# Altium PCB spectroscopy_pcb.PcbDoc
Units mm, origin at the board's own origin, x right, y up, seen from the top; angles counter-clockwise.
Board outline 62.86 x 32.89 mm, 4 copper layers (Top Layer, Mid Layer 1, Mid Layer 2, Bottom Layer), stack 1.57 mm thick; 52 components, 39 nets, 192 pads, 13 vias.
Unrouted connection lines stored in the file: 61.
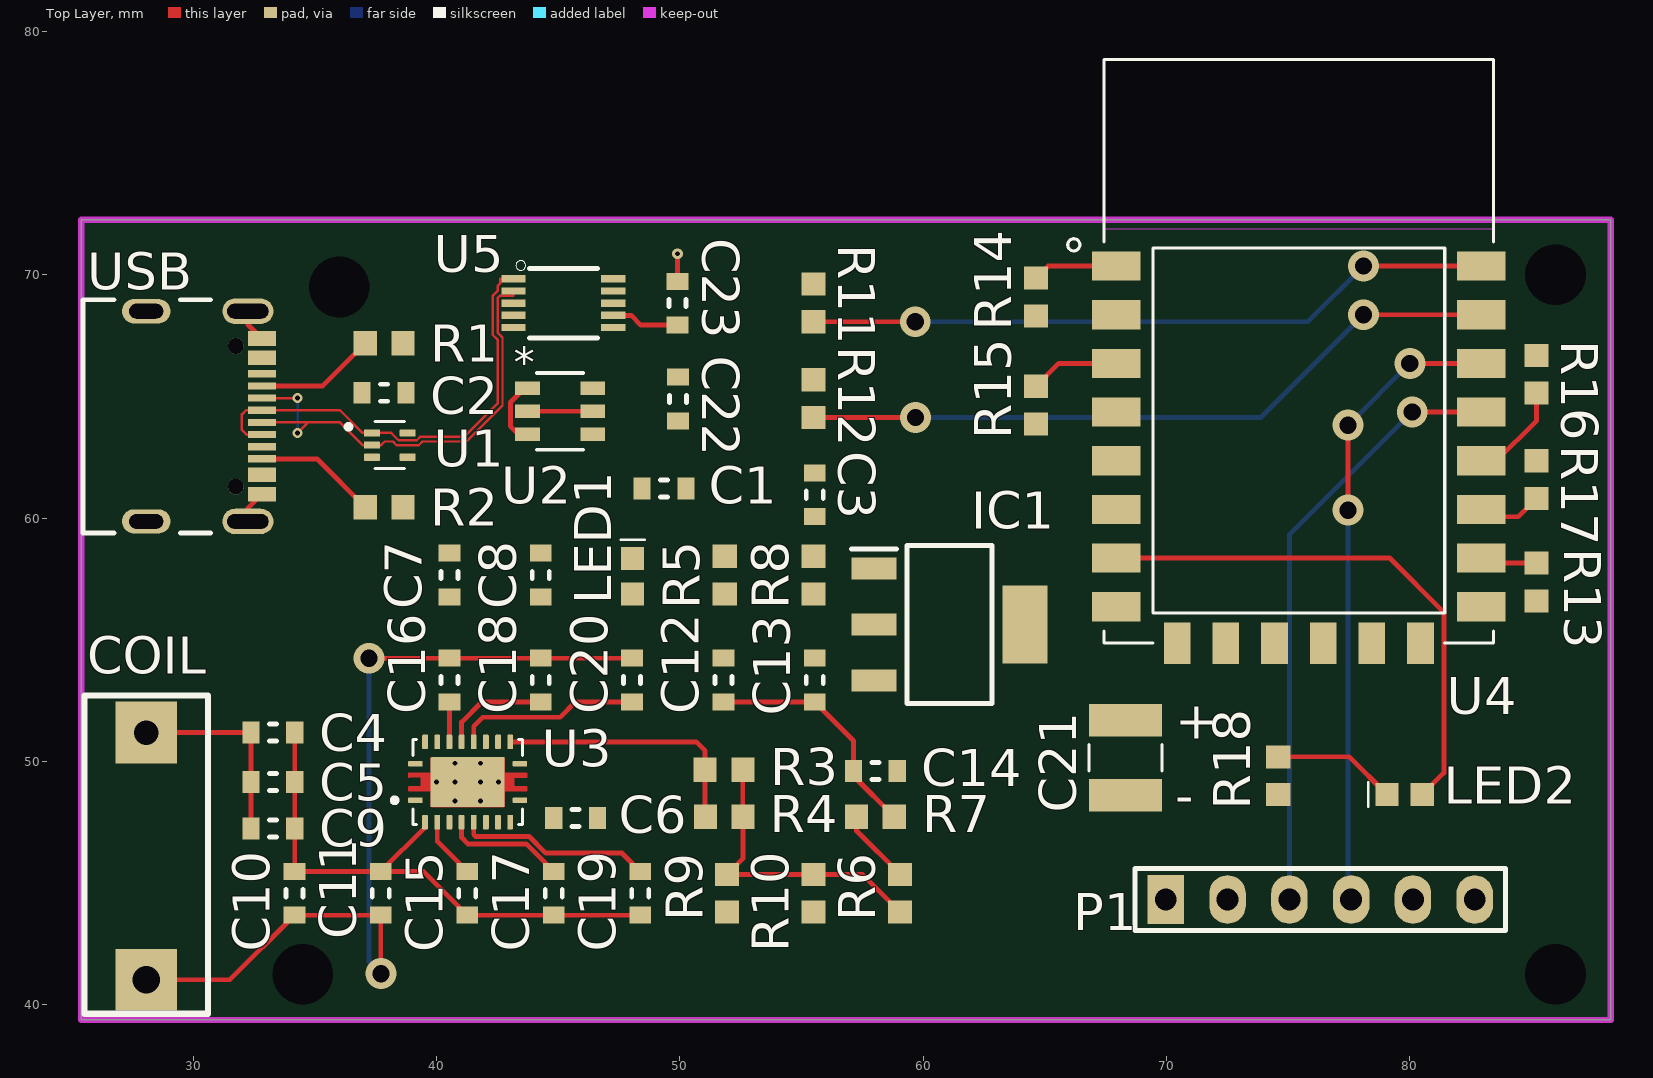
[diagram p0: Top Layer view]
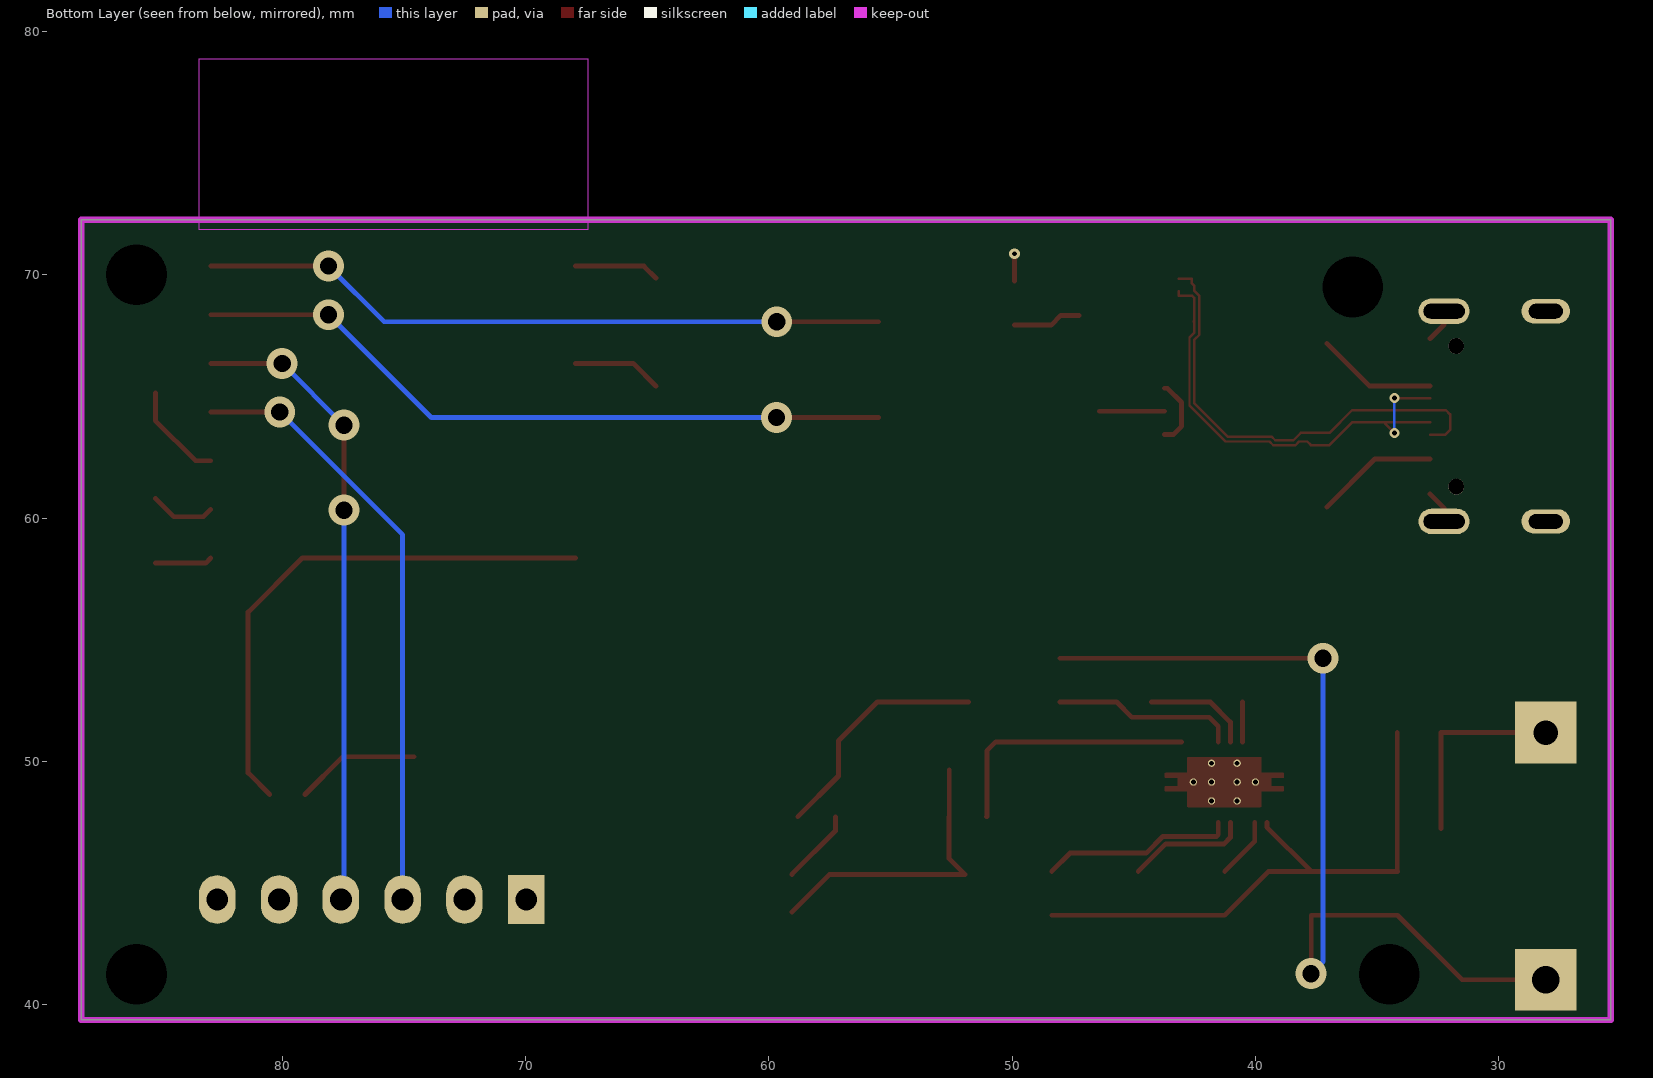
[diagram p1: Bottom Layer view, seen from below]
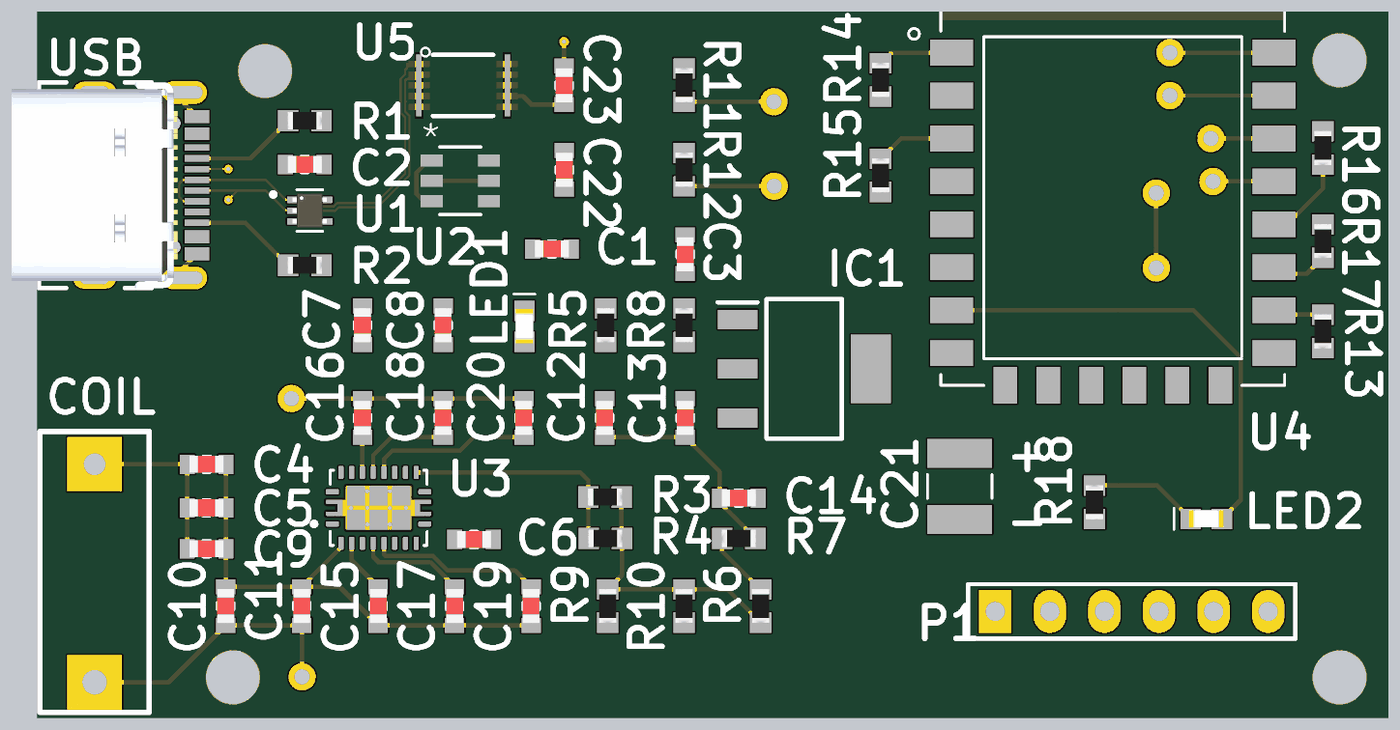
[diagram p2: 3D render of the assembled board from above, using the file's embedded part models]

## Layer stack, top to bottom
Top Solder: solder mask 0.0127, Solder Resist, Dk 3.8
Top Layer: signal copper 0.035
Dielectric 1: prepreg 0.1, 2313, Dk 4.05
Mid Layer 1: signal copper 0.0175
Core: core 1.265, FR-4, Dk 4.5
Mid Layer 2: signal copper 0.0175
Dielectric 2: prepreg 0.1, 2313, Dk 4.05
Bottom Layer: signal copper 0.035
Bottom Solder: solder mask 0.0127, Solder Resist, Dk 3.8

## Board outline
25.4,39.37 25.4,72.263 88.265,72.263 88.265,39.37

## Design rules (kind name [scope] priority, off if disabled: settings)
BoardOutlineClearance [All] p1: gap=0.2 ignorepadtopadclearanceinfootprint=FALSE
Clearance [All] p1: gap=0.102 ignorepadtopadclearanceinfootprint=FALSE except(0.127: Arc-Via Track-Via SMDPad-Via THPad-Via Via-Via Via-Fill Via-Poly Via-Region Via-Text; 0.25: Arc-Hole Track-Hole SMDPad-Hole THPad-Hole Via-Hole Fill-Hole Poly-Hole Region-Hole Text-Hole)
ComponentClearance [All] p1: gap=0.102 collisioncheckmode=3 verticalgap=0.102 showdistances=TRUE
DiffPairsRouting [All] p1: maxlimit=0.102 minlimit=0.102 mostfreqgap=0.102 toplayer_minwidth=0.102 toplayer_maxwidth=1816.048 toplayer_prefwidth=0.102 midlayer1_minwidth=0.102 midlayer1_maxwidth=1816.048 midlayer1_prefwidth=0.102 midlayer2_minwidth=0.102 midlayer2_maxwidth=1816.048 midlayer2_prefwidth=0.102 bottomlayer_minwidth=0.102 bottomlayer_maxwidth=1816.048 bottomlayer_prefwidth=0.102 maxuncoupledlength=12.7
Height [All] p1: minheight=0 maxheight=1816.048 prefheight=12.7
HoleSize [All] p1: absolutevalues=TRUE maxlimit=6.3 minlimit=0.2 maxpercent=80.000 minpercent=20.000
HoleToHoleClearance [All] p1: gap=0.25 allowstackedmicrovias=FALSE
MinimumAnnularRing [All] p1: minimumring=0.076
MinimumSolderMaskSliver [All] p1: minsoldermaskwidth=0
PlaneClearance [All] p1: clearance=0.102
PlaneConnect PlaneConnectPowerPads [InPadClass('PowerPads')] p1: planeconnectstyle=Direct reliefexpansion=0.508 reliefentries=4 reliefconductorwidth=0.254 reliefairgap=0.254
PlaneConnect [All] p2: pad.planeconnectstyle=Relief pad.reliefexpansion=0.3 pad.reliefentries=4 pad.reliefconductorwidth=0.102 pad.reliefairgap=0.102 via.planeconnectstyle=Direct via.reliefexpansion=0.3 via.reliefentries=4 via.reliefconductorwidth=0.127 via.reliefairgap=0.127
PolygonConnect PolygonConnectPowerPads [All vs (InPadClass('PowerPads'))] p1: connectstyle=Direct reliefconductorwidth=0.254 reliefentries=4 polygonreliefangle="90 Angle" airgapwidth=0.254
PolygonConnect [All] p2: thpad.connectstyle=Relief thpad.reliefconductorwidth=0.102 thpad.reliefentries=4 thpad.polygonreliefangle="90 Angle" thpad.airgapwidth=0.102 smdpad.connectstyle=Relief smdpad.reliefconductorwidth=0.102 smdpad.reliefentries=4 smdpad.polygonreliefangle="90 Angle" smdpad.airgapwidth=0.102 via.connectstyle=Direct via.reliefconductorwidth=0.127 via.reliefentries=4 via.polygonreliefangle="90 Angle" via.airgapwidth=0.127
RoutingVias [All] p1: holewidth=0.2 width=0.4 viastyle="Through Hole" minholewidth=0.2 minwidth=0.4 maxholewidth=6.3 maxwidth=6.55
SilkToSilkClearance [All] p1: silktosilkclearance=0
SilkToSolderMaskClearance [IsPad] p1: minsilkscreentomaskgap=0.102 clearancetoexposedcopper=TRUE
SolderMaskExpansion [All] p1: expansion=0.075
Width [All] p1: maxlimit=1816.048 minlimit=0.102 preferedwidth=0.2
20 further rules are at their usual default settings.

## Classes and differential pairs
differential pair D: +D_P -D_N

## Components (designator, comment, footprint, x,y, rotation, side; value= is the part's Value field where it differs from the comment)
C1 "22uF" CAP0603 49.349,61.214 r180 top
C2 "0.1uF" CAP0603 37.846,65.151 r180 top
C3 "10uF" CAP0603 55.549,60.96 r90 top
C4 "12 nF" CAP0603 33.274,51.181 r0 top
C5 "39 nF" CAP0603 33.274,49.149 r0 top
C6 "1uF" CAP0603 45.72,47.674 r0 top
C7 "10uF" CAP0603 40.53,57.658 r90 top
C8 "0.1uF" CAP0603 44.285,57.658 r90 top
C9 "82 nF" CAP0603 33.274,47.244 r0 top
C10 "1.8 nF" CAP0603 34.163,44.577 r270 top
C11 "100 pF" CAP0603 37.708,44.577 r270 top
C12 "10uF" CAP0603 51.794,53.34 r90 top
C13 "10uF" CAP0603 55.549,53.34 r90 top
C14 "0.1uF" CAP0603 58.039,49.607 r0 top
C15 "10nF" CAP0603 41.264,44.577 r90 top
C16 "10nF" CAP0603 40.53,53.34 r270 top
C17 "0.47uF" CAP0603 44.82,44.577 r90 top
C18 "0.47uF" CAP0603 44.285,53.34 r270 top
C19 "22nF" CAP0603 48.376,44.577 r90 top
C20 "22nF" CAP0603 48.04,53.34 r270 top
C21 "100uF TAJB107K006RNJ" CAPPC3528X210N 68.321,50.149 r270 top
C22 "10uF" CAP0603 49.924,64.897 r270 top
C23 "100nF" CAP0603 49.911,68.834 r90 top
COIL "WR483265-15F5-G" ece-INDUCTOR1005 28.067,41.021 r90 top (schematic designator L1)
IC1 "AZ1117IH-3.3TRG1" SOT230P700X170-4N 61.087,55.626 r0 top
LED1 "QTLP601C4TR" LED0603P 48.065,57.608 r90 top
LED2 "QTLP601C4TR" LED0603P 79.795,48.637 r180 top
P1 "Header 6" ece-HDR1X6 69.977,44.323 r0 top
R1 "5.1k 5%" RES0603 37.846,67.183 r180 top
R2 "5.1k 5%" RES0603 37.846,60.452 r180 top
R3 "330" RES0603 51.816,49.657 r180 top
R4 "39k" RES0603 51.829,47.724 r180 top
R5 "1.5k" RES0603 51.844,57.658 r90 top
R6 "10k" RES0603 59.055,44.577 r90 top
R7 "10k" RES0603 58.039,47.724 r0 top
R8 "10k" RES0603 55.499,57.658 r270 top
R9 "220" RES0603 51.943,44.577 r90 top
R10 "1.8k" RES0603 55.499,44.577 r90 top
R11 "470" RES0603 55.499,68.847 r270 top
R12 "470" RES0603 55.499,64.91 r270 top
R13 "10k" RES0603 85.217,57.373 r90 top
R14 "10k" RES0603 64.643,69.088 r270 top
R15 "10k" RES0603 64.643,64.643 r270 top
R16 "10k" RES0603 85.217,65.913 r90 top
R17 "10k" RES0603 85.217,61.582 r90 top
R18 "470" RES0603 74.593,49.412 r270 top
U1 "TPD3E001DRLR" SOT50P160X60-5N 38.081,63 r0 top
U2 "Dual PMOS with Common Source for Reverse Current Blocking" TRANS_QS6_ROM 45.085,64.389 r0 top
U3 "BQ51013BRHLT" IC_MSP430FR2522IRHLR 41.28,49.149 r90 top
U4 "ESP8266-12E/ESP-12E" XCVR_ESP8266-12E/ESP-12E 75.445,63.358 r0 top
U5 "CH340E" MSOP10 45.212,68.834 r0 top
USB "USB4105-GF-A" GCT_USB4105-GF-A 28.067,64.183 r270 top (schematic designator J1)

## Footprints (in the part's own frame and the unit in brackets; to place one, negate y for a bottom-side part, rotate by r counter-clockwise, add the part's x,y. Pads: shape width x height; smd on the part's side, far side on the other; paste and mask are expansions set on the pad)
CAP0603 [mm] "Chip Capacitor, 2-Leads, Body 1.6x0.8mm, IPC Medium Density"
  rect 0.7x0.9 smd: 1(-0.9,0) 2(0.9,0)
  silkscreen extent -0.15,-0.35 0.15,0.35, body extent -0.8,-0.4 0.8,0.4, height 0.3
CAPPC3528X210N [mm]
  rect 1.34x3.02 smd: 1(-1.54,0) 2(1.54,0)
  silkscreen extent -0.55,-1.5 0.55,1.5
ece-HDR1X6 [mm] "Header 6 way"
  rect 1.5x2 hole 0.9: 1(0,0)
  oval 1.5x2 hole 0.9: 2(2.54,0) 3(5.08,0) 4(7.62,0) 5(10.16,0) 6(12.7,0)
  silkscreen extent -1.27,-1.27 13.97,1.27
ece-INDUCTOR1005 [mil]
  rect 100x100 hole 45: 1(0,0)
  rect 100x100 hole 40: 2(400,0)
  silkscreen extent -55,-100 460,100
GCT_USB4105-GF-A [mm]
  rect 0.6x1.15 smd: A1_B12(-3.2,4.755) A4_B9(-2.4,4.755) B1_A12(3.2,4.755) B4_A9(2.4,4.755)
  rect 0.3x1.15 smd: A5(-1.25,4.755) A6(-0.25,4.755) A7(0.25,4.755) A8(1.25,4.755) B5(1.75,4.755) B6(0.75,4.755) B7(-0.75,4.755) B8(-1.75,4.755)
  oval 1.05x2.1 hole 0.6 slot 1.7 at 90 deg: S1(-4.32,4.18) S4(4.32,4.18)
  oval 1x2 hole 0.6 slot 1.4 at 90 deg: S2(-4.32,0) S3(4.32,0)
  round 0.65 hole 0.65 unplated: ""(-2.89,3.68) ""(2.89,3.68)
  silkscreen extent -4.79,-2.6 4.79,2.65, body extent -4.79,-3.86 4.79,3.86, height 3.31
IC_MSP430FR2522IRHLR [mm]
  rrect42% 0.24x0.6 smd: 1(-0.75,2.15) 10(-0.75,-2.15) 11(0.75,-2.15) 20(0.75,2.15)
  rrect42% 0.6x0.24 smd: 2(-1.65,1.75) 3(-1.65,1.25) 4(-1.65,0.75) 5(-1.65,0.25) 6(-1.65,-0.25) 7(-1.65,-0.75) 8(-1.65,-1.25) 9(-1.65,-1.75) 12(1.65,-1.75) 13(1.65,-1.25) 14(1.65,-0.75) 15(1.65,-0.25) 16(1.65,0.25) 17(1.65,0.75) 18(1.65,1.25) 19(1.65,1.75)
  rrect5% 2.05x3.05 smd paste-3: 21(0,0)
  round 0.3 hole 0.2: 22(0,1.275) 23(-0.775,0.525) 24(0,0.525) 25(0.775,0.525) 26(-0.775,-0.525) 27(0,-0.525) 28(0.775,-0.525) 29(0,-1.275)
  Top Layer region: 381 vertices and 0 holes, not listed, extent -1.025,-2.45 1.025,2.45
  silkscreen extent -1.75,-2.25 1.75,3.1
LED0603P [mm]
  rect 0.95x0.95 smd: 1(-0.725,0) 2(0.725,0)
  silkscreen extent 1.5,-0.5 1.5,0.5, body extent -0.8,-0.4 0.81,0.4, height 0.72
MSOP10 [mm]
  rect 1x0.3 smd paste-1 mask+0: 1(-2.05,1) 2(-2.05,0.5) 3(-2.05,0) 4(-2.05,-0.5) 5(-2.05,-1) 6(2.05,-1) 7(2.05,-0.5) 8(2.05,0) 9(2.05,0.5) 10(2.05,1)
  silkscreen extent -1.95,-1.43 1.4,1.75
RES0603 [mm] "Chip Resistor, 2-Leads, Body 1.6x0.8mm, IPC Medium Density"
  rect 0.95x1 smd: 1(-0.775,0) 2(0.775,0)
  body extent -0.8,-0.4 0.8,0.4, height 0.45
SOT50P160X60-5N [mm]
  rrect25% 0.66x0.3 smd: 1(-0.735,0.5) 2(-0.735,0) 3(-0.735,-0.5) 4(0.735,-0.5) 5(0.735,0.5)
  silkscreen extent -1.8,-0.97 0.6,0.97, body extent -0.8,-0.8 0.8,0.8, height 0.6
SOT230P700X170-4N [mm]
  rect 1.85x0.9 smd: 1(-3.1,2.3) 2(-3.1,0) 3(-3.1,-2.3)
  rect 1.85x3.2 smd: 4(3.1,0)
  silkscreen extent -4.03,-3.25 1.75,3.25
TRANS_QS6_ROM [mm]
  rect 1.023x0.558 smd paste+0 mask+0: 1(-1.337,0.95) 2(-1.337,0) 3(-1.337,-0.95) 4(1.337,-0.95) 5(1.337,0) 6(1.337,0.95)
  silkscreen extent -0.95,-1.57 0.95,1.57, body extent 0,0 0.25,0.25, height 0.25
XCVR_ESP8266-12E/ESP-12E [mm]
  rect 2x1.2 smd: 1(-7.5,7) 2(-7.5,5) 3(-7.5,3) 4(-7.5,1) 5(-7.5,-1) 6(-7.5,-3) 7(-7.5,-5) 8(-7.5,-7) 15(7.5,-7) 16(7.5,-5) 17(7.5,-3) 18(7.5,-1) 19(7.5,1) 20(7.5,3) 21(7.5,5) 22(7.5,7)
  rect 1.1x1.7 smd: 9(-5,-8.5) 10(-3,-8.5) 11(-1,-8.5) 12(1,-8.5) 13(3,-8.5) 14(5,-8.5)
  Keep-Out Layer region: 8,8.51 -8.009,8.51 -8.009,15.5 8,15.5
  Keep-Out Layer region: 8,8.51 -8.009,8.51 -8.009,15.5 8,15.5
  silkscreen extent -9.5,-8.5 8,15.5

## Part data
C1 C2 C3 C4 C5 C6 C7 C8 C9 C10 C11 C12 C13 C14 C15 C16 C17 C18 C19 C20 C22 C23: library part "CAP SM0603", "SM capacitor"
C21: library part TAJB107K006RNJ, "100µF Molded Tantalum Capacitors 6.3V 1411 _3528 Metric_, 1210 1.7Ohm", Package="1210 AVX", Availability=Unavailable, MF=AVX, MP=TAJB107K006RNJ, Price=None, SnapEDA_Link=https://www.snapeda.com/parts/TAJB107K006RNJ/AVX/view-part/381691/?ref=snap
COIL: library part Inductor, "inductor Surface Mount"
IC1: "Linear Voltage Regulator IC Positive Fixed 1 Output 1A SOT-223", Package="SOT-223 Diodes Inc.", Availability=Warning, Check_prices=https://www.snapeda.com/parts/AZ1117IH-3.3TRG1/Diodes%20Inc./view-part/490259/?ref=eda, MF="Diodes Inc.", MP=AZ1117IH-3.3TRG1, Price=None, Purchase-URL=https://pricing.snapeda.com/search/part/AZ1117IH-3.3TRG1/?ref=eda, SnapEDA_Link=https://www.snapeda.com/parts/AZ1117IH-3.3TRG1/Diodes%20Inc./view-part/490259/?ref=snap
LED1 LED2: library part LNJ337W83RA, "LED SM 0603 GREEN 1V95 FWD VOLTAGE", Forward Voltage=1V95, Supplier Part Number 1=LNJ337W83RACT-ND, Supplier 1=Digi-Key
P1: "Header, 6-Pin", LatestRevisionDate=17-Jul-2002, LatestRevisionNote="Re-released for DXP Platform.", Publisher="Altium Limited"
R1 R2 R3 R4 R5 R6 R7 R8 R9 R10 R11 R12 R13 R14 R15 R16 R17 R18: library part "Res SM 0603", "Resistor"
U1: "Low-capacitance 3-channel +/-15K-V ESD-protection array for high-speed data interfaces 5-SOT-5X3 -40 to 85", Package="SOT-5X3-5 Texas Instruments", Check_prices=https://www.snapeda.com/parts/TPD3E001DRLR/Texas%20Instruments/view-part/382422/?ref=eda, Digi-Key_Part_Number=296-21885-1-ND, MF="Texas Instruments", MP=TPD3E001DRLR, Purchase-URL=https://pricing.snapeda.com/search/part/TPD3E001DRLR/?ref=eda, SnapEDA_Link=https://www.snapeda.com/parts/TPD3E001DRLR/Texas%20Instruments/view-part/382422/?ref=snap
U2: library part QS6J1TR, "No Description Available", Built_By=EMA_Matt, Copyright="Copyright (C) 2018 Accelerated Designs. All rights reserved", Manufacturer_Part_Number=QS6J1TR, RefDes=RefDes, SourceLibrary=Rohm_2019-09-23, Type=DEV, Vendor="ROHM Semiconductor"
U3: "WPC 1.1 Compatible Fully integrated Wireless power Receiver IC 20-VQFN 0 to 125", Package="VQFN-20 Texas Instruments", Digi-Key_Part_Number=296-35638-1-ND, DigiKey-Purchase-URL=https://snapeda.com/shop?store=DigiKey&id=46178, MF="Texas Instruments", Mouser-Purchase-URL=https://snapeda.com/shop?store=Mouser&id=46178, MP=BQ51013BRHLT, SnapEDA_Link=https://www.snapeda.com/parts/BQ51013BRHLT/Texas%20Instruments/view-part/46178/?ref=snap, Texas_Instruments-Purchase-URL=https://snapeda.com/shop?store=Texas+Instruments&id=46178
U4: "This WiFi module has a 32-bit MCU micro and clock speeds supporting 80 MHz or 160 MHz. Supports the RTOS and integrated Wi-Fi MAC/BB/RF/PA/LNA, and has an on-board antenna.", Package=None, Availability=Unavailable, MF=AI-Thinker, MP=ESP8266-12E/ESP-12E, Price=None, SnapEDA_Link=https://www.snapeda.com/parts/ESP8266-12E/ESP-12E/AI-Thinker/view-part/106414/?ref=snap
U5: "USB转串口芯片CH340", Package="Package Analog Devices", Availability=Unavailable, MF=WCH, MP=CH340E, Price=None, SnapEDA_Link=https://www.snapeda.com/parts/CH340E/WCH/view-part/3625184/?ref=snap
USB: "USB-C (USB TYPE-C) USB 2.0 Receptacle Connector 24 (16+8 Dummy) Position Surface Mount, Right Angle; Through Hole", Package=None, Availability=Warning, Check_prices=https://www.snapeda.com/parts/USB4105-GF-A/Global%20Connector%20Technology/view-part/4423780/?ref=eda, MF=GCT, MP=USB4105-GF-A, Price=None, Purchase-URL=https://pricing.snapeda.com/search/part/USB4105-GF-A/?ref=eda, SnapEDA_Link=https://www.snapeda.com/parts/USB4105-GF-A/Global%20Connector%20Technology/view-part/4423780/?ref=snap

## Free pads (board coordinates)
  round 1.524 hole 2.5: M3(34.5,41.25) M3(36,69.5) M3(86,41.25) M3(86,70)

## Via types
v1: diameter 1.27, hole 0.711, Top Layer to Bottom Layer, 10 vias
v2: diameter 0.4, hole 0.2, Top Layer to Bottom Layer, 2 vias
v3: diameter 0.45, hole 0.2, Top Layer to Bottom Layer, 1 vias

## Nets (pads, with @x,y where several pads share a name; then routed paths per layer and width w, separated by ;. In a path a pad name is that pad's centre, name@x,y a point inside that pad or via, vN(x,y) a via of type N, cw(c..) or ccw(c..) an arc to the next point about the centre after c; other vN are vias at no path point)
3.3V: C1.1 C21.1 IC1.2 P1.2 R14.2 R15.2 R16.2 R17.2 U4.8
5V_USB: C2.1 C6.1 U1.5 U2.6 U3.9 USB.A4_B9 USB.B4_A9
AC1: C4.2 C5.2 C9.2 C10.1 C11.1 C15.1 C17.1 C19.1 U3.2 | length 23.4
  Top Layer w0.2: C4.2 C5.2 C9.2 34.174,45.488 C10.1 C11.1 ; U3.2 39.53,47.299 C11.1 ; C19.1 C17.1 C15.1 39.464,45.477 C11.1
AC2: C10.2 C11.2 C16.1 C18.1 C20.1 COIL.1 U3.19 | length 37.1
  Top Layer w0.2: COIL.1 31.507,41.021 C10.2 C11.2 37.708,41.286 v1(37.719,41.275) ; v1(37.222,54.24) C16.1 C18.1 C20.1
  Bottom Layer w0.2: v1(37.222,54.24) 37.222,41.772 v1(37.719,41.275)
AD-EN: U2.1 U2.3 U3.8 | length 2.8
  Top Layer w0.2: U2.3 43.368,63.439 43.035,63.772 43.035,64.752 43.622,65.339 U2.1
BOOT1: C15.2 U3.3 | length 2.5
  Top Layer w0.2: U3.3 40.03,46.711 C15.2
BOOT2: C16.2 U3.17 | length 1.6
  Top Layer w0.2: U3.17 C16.2
CC1: R1.2 USB.A5 | length 5
  Top Layer w0.2: USB.A5 35.321,65.433 R1.2
CC2: R2.2 USB.B5 | length 5.1
  Top Layer w0.2: USB.B5 35.09,62.433 R2.2
CLAMP1: C17.2 U3.5 | length 5
  Top Layer w0.2: U3.5 41.03,46.872 41.293,46.609 43.688,46.609 C17.2
CLAMP2: C18.2 U3.16 | length 4.4
  Top Layer w0.2: U3.16 41.03,51.615 41.855,52.44 C18.2
COMM1: C19.2 U3.6 | length 8
  Top Layer w0.2: U3.6 41.53,46.989 41.608,46.911 43.813,46.911 44.496,46.228 47.625,46.228 C19.2
COMM2: C20.2 U3.15 | length 7.6
  Top Layer w0.2: U3.15 41.53,51.436 41.909,51.815 45.084,51.815 45.709,52.44 C20.2
D_N: U1.2 U5.2 USB.A7 USB.B7 | length 20
  Top Layer w0.102: USB.A7 34.671,63.933 ; USB.B7 v2(34.29,64.933) ; v2(34.29,63.5) 34.671,63.881 34.671,63.933 ; U5.2 43.162,69.136 42.599,69.136 42.51,69.047 42.51,68.121 42.546,68.084 42.51,68.047 42.51,67.621 42.713,67.418 42.713,64.629 41.232,63.148 39.425,63.148 39.271,62.994 38.361,62.994 38.207,63.148 37.875,63.148 37.727,63 U1.2 36.965,63 36.032,63.933 34.671,63.933
  Bottom Layer w0.102: v2(34.29,63.5) v2(34.29,64.933)
D_P: U1.1 U5.1 USB.A6 USB.B6 | length 19.1
  Top Layer w0.102: USB.B6 32.198,63.433 32.004,63.627 32.004,64.262 32.175,64.433 USB.A6 36.032,64.433 36.965,63.5 U1.1 38.142,63.5 38.445,63.198 39.187,63.198 39.341,63.352 41.148,63.352 42.51,64.713 42.51,67.334 42.306,67.537 42.306,69.131 42.51,69.334 42.51,69.547 42.611,69.649 42.611,69.834 U5.1
EN: R15.1 U4.3 | length 3.7
  Top Layer w0.2: R15.1 65.583,66.358 U4.3
FOD: R3.1 R4.1 R6.1 R9.2 R10.2 U3.14 | length 12.3
  Top Layer w0.2: R3.1 52.591,47.737 R4.1 52.604,46.013 R9.2 R10.2 57.505,45.352 R6.1
GND: C1.2 C2.2 C3.2 C6.2 C7.2 C8.2 C12.2 C13.2 C14.2 C21.2 C22.2 C23.2 IC1.1 P1.1 R1.1 R2.1 R8.1 R9.1 R10.1 R13.1 R18.2 U1.3 U3.1 U3.20 U3.21 U3.22 U3.23 U3.24 U3.25 U3.26 U3.27 U3.28 U3.29 U4.15 U5.3 USB.A1_B12 USB.B1_A12 USB.S1 USB.S2 USB.S3 USB.S4 | length 3.8
  Top Layer w0.2: USB.S4 32.247,60.408 USB.B1_A12 ; USB.S1 32.247,67.958 USB.A1_B12 ; C23.2 v3(49.911,70.866)
GPIO0: R16.1 U4.18 | length 4.1
  Top Layer w0.2: U4.18 83.567,62.358 85.217,64.008 R16.1
GPIO2: R17.1 U4.17 | length 2.7
  Top Layer w0.2: U4.17 83.246,60.057 84.467,60.057 R17.1
ILIM: R3.2 R4.2 U3.12 | length 10.9
  Top Layer w0.2: U3.12 50.674,50.799 51.041,50.432 R3.2 51.041,47.737 R4.2
NetC4_1: C4.1 C5.1 C9.1 COIL.2 | length 8.2
  Top Layer w0.2: COIL.2 C4.1 C5.1 C9.1
NetC22_1: C22.1 U5.10
NetLED1_2: LED1.2 R5.2
NetLED2_2: LED2.2 R18.1 | length 5.1
  Top Layer w0.2: R18.1 77.52,50.187 LED2.2
NetR6_2: R6.2 R7.1 | length 3.1
  Top Layer w0.2: R7.1 57.264,47.143 R6.2
NetR11_1: R11.1 U5.8
NetR12_1: R12.1 U5.9
NetR13_2: R13.2 U4.16 | length 2.4
  Top Layer w0.2: U4.16 83.155,58.148 R13.2
OUT: C3.1 C7.1 C8.1 C23.1 IC1.3 LED1.1 U2.4 U3.4 U5.7 | length 2.8
  Top Layer w0.2: U5.7 47.998,68.334 48.398,67.934 C23.1
RECT: C12.1 C13.1 C14.1 R7.2 U3.18 | length 9.8
  Top Layer w0.2: C12.1 C13.1 57.139,50.85 C14.1 57.139,49.399 R7.2
RESET: R14.1 U4.1 | length 3.5
  Top Layer w0.2: R14.1 65.138,70.358 U4.1
RX: R12.2 U4.21 | length 29.2
  Top Layer w0.2: R12.2 v1(59.69,64.135) ; v1(78.105,68.358) U4.21
  Bottom Layer w0.2: v1(59.69,64.135) 73.882,64.135 v1(78.105,68.358)
SCL: P1.4 U4.20 | length 26.1
  Top Layer w0.2: v1(77.47,60.325) v1(77.47,63.818) ; v1@80.01,66.294 80.074,66.358 U4.20
  Bottom Layer w0.2: v1(77.47,60.325) 77.47,44.45 P1.4 ; v1(77.47,63.818) v1(80.01,66.358)
SDA: P1.3 U4.19 | length 25
  Top Layer w0.2: v1@80.01,64.262 v1(80.106,64.358) U4.19
  Bottom Layer w0.2: P1.3 75.057,59.309 v1@80.01,64.262
SOURCE: U2.2 U2.5 | length 2.7
  Top Layer w0.2: U2.2 U2.5
TS: R5.1 R8.2 U3.13
TX: R11.2 U4.22 | length 28.4
  Top Layer w0.2: R11.2 v1(59.677,68.072) ; v1(78.105,70.358) U4.22
  Bottom Layer w0.2: v1(59.677,68.072) 75.819,68.072 v1(78.105,70.358)
WIFI_LED: LED2.1 U4.7 | length 22.2
  Top Layer w0.2: U4.7 79.185,58.358 81.407,56.136 81.407,49.524 LED2.1
pads on no net: IC1.4 P1.5 P1.6 U1.4 U3.7 U3.10 U3.11 U4.2 U4.4 U4.5 U4.6 U4.9 U4.10 U4.11 U4.12 U4.13 U4.14 U5.4 U5.5 U5.6 USB. USB.A8 USB.B8

## Keep-outs
Keep-Out Layer:
  lines w0.254: 25.4,39.37 88.265,39.37 88.265,72.263 25.4,72.263 25.4,70.993 25.4,39.37

## Silkscreen, mask and mechanical layers (free items; w line width, h text height)
Top Overlay:
  text "+" at 70.358,50.927 h1.52
  text "-" at 70.358,47.847 h1.52

## Text inside footprints (layer, text, board x,y; h text height)
U2: Top Overlay "*" at 43.176,65.77 h1.27; Mechanical 13 "*" at 44.323,64.491 h1.27
USB: Mechanical 13 "PCB EDGE" at 25.567,58.783 h0.41 r270